# Altium PCB {TEX137}_F2837x_controlCARD_R1.3_PCB_PADS.PcbDoc (part 2 of 6)
Units mm, origin at the board's own origin, x right, y up, seen from the top; angles counter-clockwise.
Board outline 105.77 x 51.09 mm, 10 copper layers (Primary Side, Inner Layer 2, Inner Layer 3, Inner Layer 4, Inner Layer 5, Inner Layer 6, Inner Layer 7, Inner Layer 8, Inner Layer 9, Secondary Side), stack 1.634 mm thick; 292 components, 317 nets, 1400 pads, 1032 vias.
Unrouted connection lines stored in the file: 106.
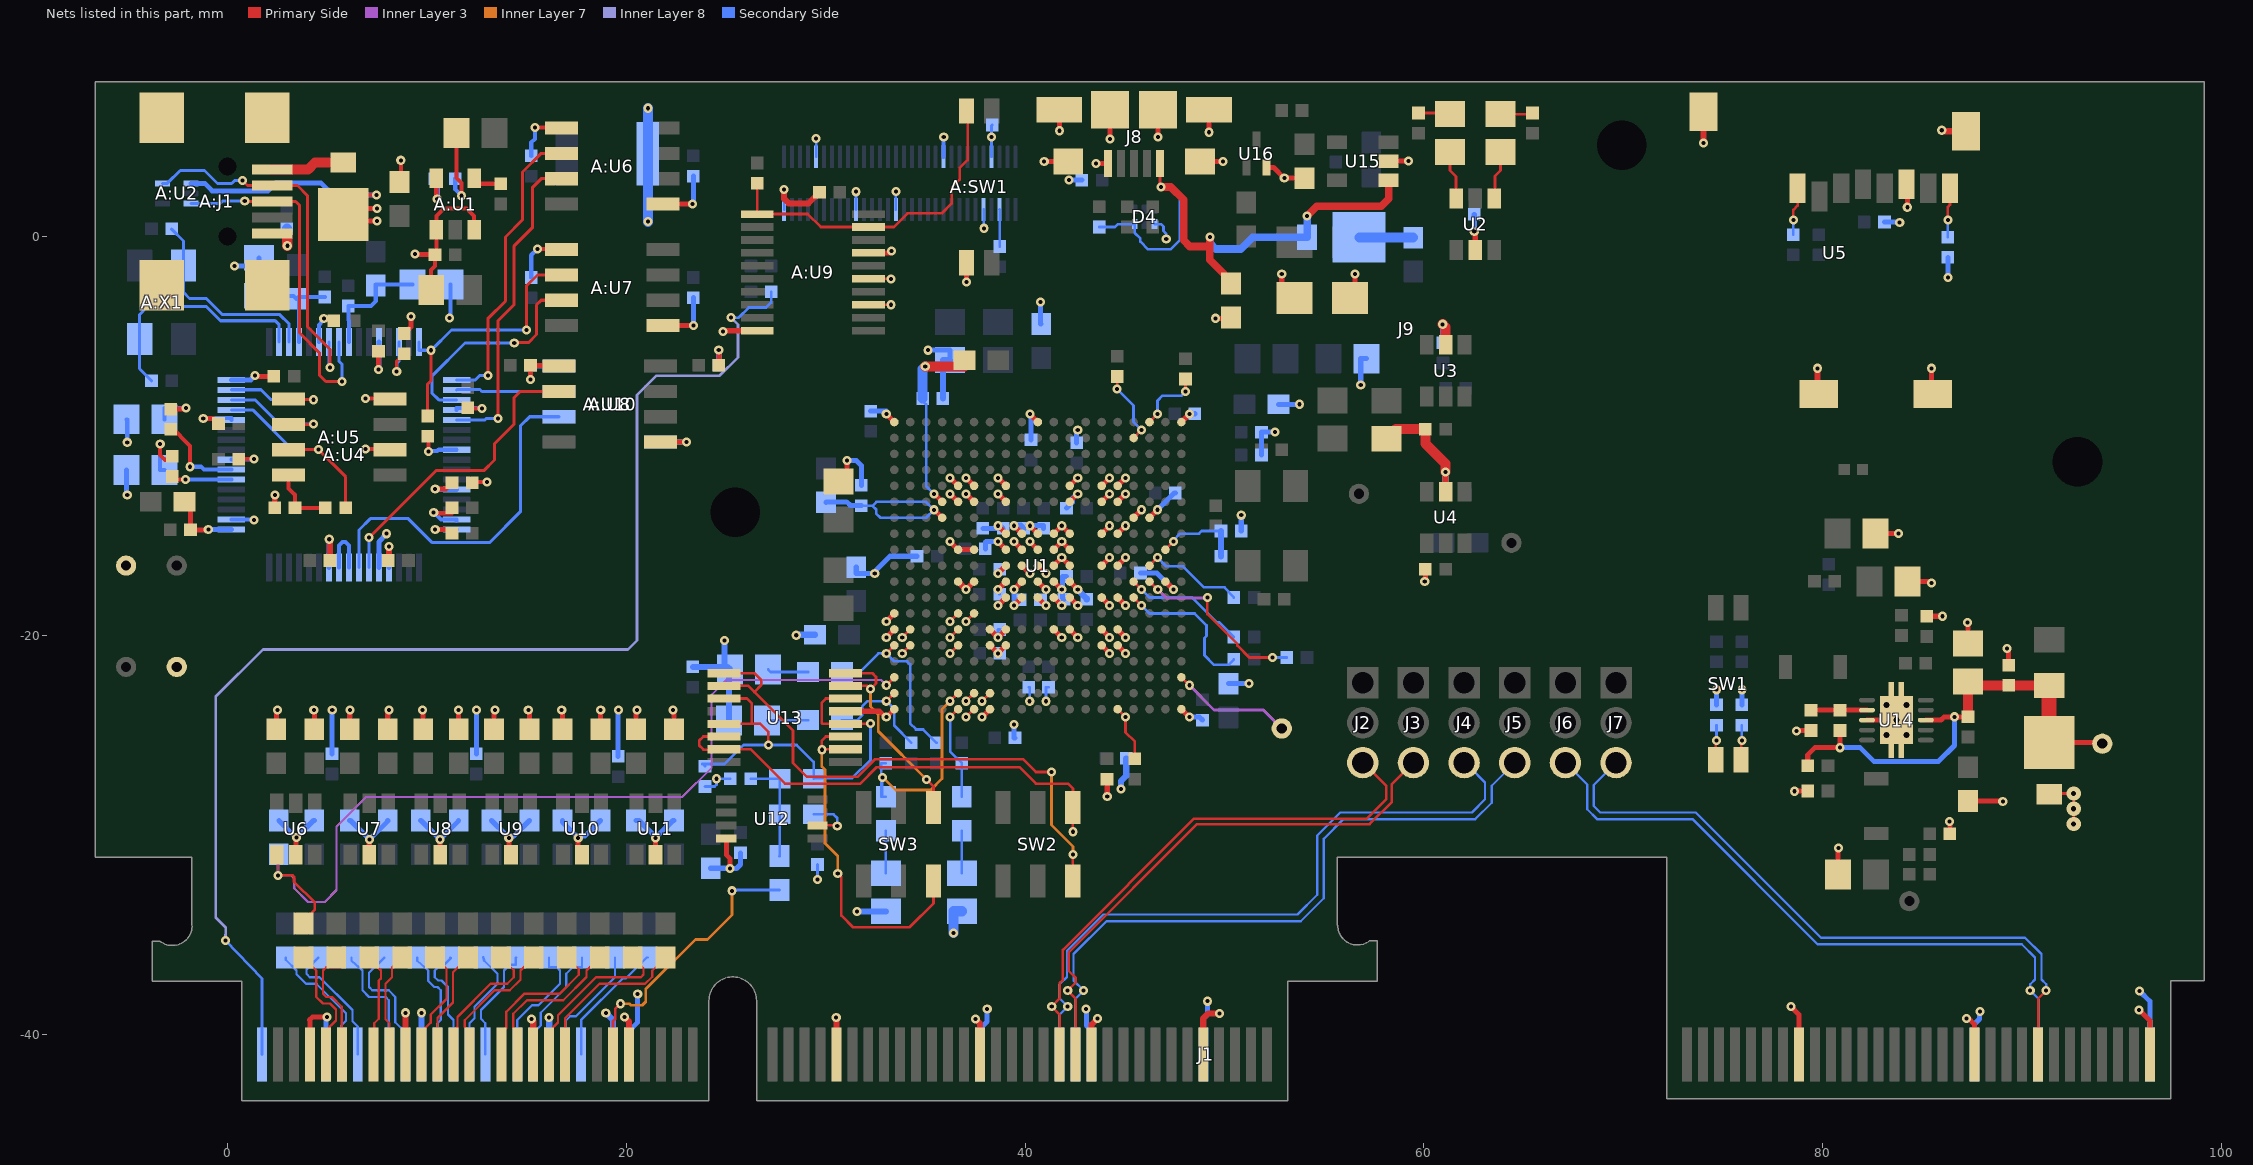
[diagram p10: the nets of this part, all layers, seen from the top]

## Via types
v1: diameter 0.457, hole 0.203, Primary Side to Secondary Side, 1025 vias
v2: diameter 0.711, hole 0.254, Primary Side to Secondary Side, 7 vias

## Nets (pads, with @x,y where several pads share a name; then routed paths per layer and width w, separated by ;. In a path a pad name is that pad's centre, name@x,y a point inside that pad or via, vN(x,y) a via of type N, cw(c..) or ccw(c..) an arc to the next point about the centre after c; other vN are vias at no path point) (continued)
$$$10464: J1.2 R2.1 | length 64.3
  Inner Layer 8 w0.14: v1(-0.097,-35.309) -0.088,-34.643 -0.583,-34.148 -0.583,-23.075 1.779,-20.713 20.092,-20.713 20.536,-20.269 20.536,-7.963 21.514,-6.985 24.686,-6.985 25.604,-6.068 25.604,-4.419 v1(25.261,-4.076)
  Secondary Side w0.135: v1(-0.097,-35.309) 1.735,-37.214 J1.2@1.735,-41.024 ; v1(25.261,-4.076) 25.642,-4.076 26.15,-3.568 27.014,-3.568 27.268,-3.314 R2.1@27.268,-2.782
$$$11861: C95.2 D3.2 D4.6 J8.1 R80.2 U15.1 | length 29.2
  Primary Side w0.135: J8.1@46.766,3.65 46.766,2.523 v1(46.813,2.476)
  Primary Side w0.381: v1(46.813,2.476) 47.308,2.476 47.955,1.829 47.955,-0.203 48.26,-0.508 49.264,-0.508 ; v1(49.264,-0.038) 49.264,-0.508 ; C95.2@50.331,-2.262 49.252,-1.182 49.264,-1.169 49.264,-0.508 ; v1(54.141,1.029) 54.154,1.029 54.636,1.512 57.849,1.512 58.23,1.893 U15.1@58.23,2.821
  Secondary Side w0.135: R80.2@43.727,0.469 44.507,0.469 44.654,0.616 D4.6@45.499,0.616 45.499,0.177 45.779,-0.102 45.779,-0.262 46.165,-0.649 47.294,-0.649 47.764,-0.179 47.764,1.93 47.218,2.476 v1(46.813,2.476) ; v1(49.264,-0.038) v1@49.276,-0.049
  Secondary Side w0.381: v1@49.276,-0.049 49.276,-0.356 49.555,-0.635 50.814,-0.635 51.41,-0.039 D3.2@54.141,-0.039 v1(54.141,1.029)
$$$12420: R10.2 U1.W15 | length 2.8
  Primary Side w0.135: U1.W15@44.64,-23.71 v1(45.04,-24.11) 45.04,-24.871 45.505,-25.336 R10.2@45.505,-26.201
$$$13142: R11.2 R12.2 U1.J18 | length 4.5
  Primary Side w0.135: U1.J18@47.04,-15.71 v1(47.441,-15.31)
  Secondary Side w0.135: v1(47.441,-15.31) 47.441,-15.249 47.779,-14.91 48.719,-14.91 48.858,-14.771 R11.2@49.823,-14.771
  Secondary Side w0.305: R12.2@49.823,-16.041 R11.2@49.823,-14.771
$$$13408: R54.2 R58.2 U1.V5 | length 11.2
  Primary Side w0.135: v1(36.24,-23.31) U1.V5@36.64,-22.91
  Inner Layer 7 w0.14: v1(32.842,-27.127) 32.868,-27.127 33.503,-27.762 35.268,-27.762 35.837,-27.193 35.837,-23.713 v1(36.24,-23.31)
  Secondary Side w0.135: v1(32.842,-27.127) R54.2@32.842,-28.105 ; R54.2@33.02,-28.105 R54.2@32.842,-28.105 ; R58.2@33.02,-26.416 32.791,-26.416 32.791,-28.105 R54.2@32.842,-28.105
$$$13414: R51.2 R55.2 U1.V1 | length 6
  Primary Side w0.135: v1(33.04,-23.31) U1.V1@33.44,-22.91
  Secondary Side w0.135: R51.2@30.823,-24.257 31.585,-24.257 31.839,-24.003 31.839,-23.559 32.088,-23.31 v1(33.04,-23.31) 33.44,-23.71 33.44,-24.537 34.29,-25.387 R55.2@34.29,-25.4
$$$13416: R52.2 R56.2 U1.W5 | length 4.8
  Primary Side w0.135: v1(36.24,-24.11) U1.W5@36.64,-23.71
  Secondary Side w0.135: v1(36.24,-24.11) 36.24,-25.826 R56.2@36.83,-26.416 R52.2@36.83,-28.105
$$$13417: R53.2 R57.2 U1.R1 | length 9.3
  Primary Side w0.135: v1(33.04,-20.91) U1.R1@33.44,-20.51
  Secondary Side w0.135: R53.2@30.823,-21.844 31.712,-21.844 32.646,-20.91 v1(33.04,-20.91) 33.44,-21.31 34.08,-21.31 34.24,-21.47 34.24,-24.423 34.519,-24.702 34.519,-24.727 34.887,-24.727 R57.2@35.56,-25.4
$$$14266: R8.2 U1.L16 | length 6.2
  Primary Side w0.135: U1.L16@45.44,-17.31 v1(45.84,-17.71)
  Secondary Side w0.135: v1(45.84,-17.71) 46.241,-18.111 48.375,-18.111 49.63,-19.366 49.744,-19.366 R8.2@50.471,-20.092
$$$14269: R7.2 U1.M16 | length 7.6
  Primary Side w0.135: U1.M16@45.44,-18.11 v1(45.84,-18.51)
  Secondary Side w0.135: v1(45.84,-18.51) 46.24,-18.91 48.501,-18.91 49.099,-19.508 49.099,-20.035 48.997,-20.136 48.997,-21.006 49.48,-21.489 50.191,-21.489 R7.2@50.471,-21.209
$$$14311: R4.1 U1.K17 | length 5.2
  Primary Side w0.135: U1.K17@46.24,-16.51 v1(46.64,-16.11)
  Secondary Side w0.135: v1(46.64,-16.11) 47.079,-16.549 47.918,-16.549 48.972,-17.603 ; 48.972,-17.603 50.002,-17.603 R4.1@50.471,-18.111
$$$14314: R3.1 U1.L17 | length 9
  Primary Side w0.135: U1.L17@46.24,-17.31 46.64,-17.71 v1(46.655,-17.71) ; v1(49.142,-18.111) 49.142,-18.941 50.642,-20.441 50.642,-20.521 51.242,-21.121 v1(52.414,-21.121)
  Inner Layer 3 w0.14: v1(46.655,-17.71) 47.079,-18.134 49.142,-18.134 v1(49.142,-18.111)
  Secondary Side w0.135: v1(52.414,-21.121) R3.1@53.125,-21.121
$$$14317: R5.1 U1.A17 | length 3.5
  Primary Side w0.135: U1.A17@46.24,-9.31 v1(46.64,-8.91) ; v1(48.045,-7.786) R5.1@48.045,-7.151
  Secondary Side w0.135: v1(46.64,-8.91) 46.64,-8.242 46.898,-7.985 47.846,-7.985 v1(48.045,-7.786)
$$$14320: R6.1 U1.B16 | length 3.8
  Primary Side w0.135: v1(44.616,-7.659) R6.1@44.616,-7.024 ; U1.B16@45.44,-10.11 v1(45.84,-9.71)
  Secondary Side w0.135: v1(44.616,-7.659) 45.44,-8.483 45.44,-9.31 v1(45.84,-9.71)
$$$14898: R22.1 SW1.3 | length 1.8
  Primary Side w0.135: SW1.3@74.637,-26.25 74.637,-25.312 v1(74.676,-25.273)
  Secondary Side w0.135: v1(74.676,-25.273) R22.1@74.676,-24.511
$$$14901: R23.1 SW1.4 | length 1.8
  Primary Side w0.135: SW1.4@75.907,-26.25 75.907,-25.312 v1(75.946,-25.273)
  Secondary Side w0.135: v1(75.946,-25.273) R23.1@75.946,-24.511
$$$15255: C47.2 R61.1 U13.3 U13.5 U13.12 U13.14 | length 22.8
  Primary Side w0.135: U13.5@24.892,-24.447 26.288,-24.447 ; U13.3@24.892,-23.177 26.059,-23.177 26.288,-23.406 26.288,-24.447 ; v1(27.127,-25.502) 27.127,-24.854 26.721,-24.447 26.288,-24.447 ; U13.14@30.988,-23.177 30.011,-23.177 29.808,-23.381 29.808,-24.423 29.832,-24.447 U13.12@30.988,-24.447 32.222,-24.447 v1(32.246,-24.423)
  Secondary Side w0.135: C47.2@23.952,-26.568 23.839,-26.455 23.813,-26.455 24.931,-26.455 25.337,-26.049 25.884,-25.502 v1(27.127,-25.502) 28.549,-25.502 29.4,-26.353 R61.1@29.4,-27.203 29.438,-27.166 31.332,-27.166 32.246,-26.252 v1(32.246,-24.423)
$$$15995: D3.1 R83.2 | length 2.7
  Secondary Side w0.135: D3.1@56.745,-0.039 D3.1@56.769,-0.064
  Secondary Side w0.508: D3.1@56.769,-0.064 R83.2@59.461,-0.064
$$$16409: C68.2 R64.1 U14.7 | length 3
  Primary Side w0.254: C68.2@79.414,-23.761 79.389,-23.736 79.389,-23.647 79.503,-23.761 R64.1@80.862,-23.761 80.862,-23.757 U14.7@82.218,-23.757
$$$18387: A:R17.1 A:SW1.4 A:U9.1 A:U9.19 | length 17.1
  Primary Side w0.135: A:R17.1@26.568,2.667 26.568,1.121 A:U9.1@26.57,1.119 29.099,1.119 29.76,0.469 A:U9.19@32.158,0.469 33.421,0.469 34.104,1.152 35.821,1.152 36.321,1.652 36.321,2.452 36.72,2.851 36.72,3.423 37.12,3.823 37.12,6.29 A:SW1.4@37.055,6.29
$$$19812: SW2.3 U13.1 U13.2 | length 28.6
  Primary Side w0.135: U13.2@24.892,-22.543 26.124,-22.543 26.426,-22.845 ; U13.1@24.892,-21.907 26.44,-21.907 26.77,-22.238 26.77,-22.5 26.426,-22.845 ; v1(41.327,-26.86) 40.538,-26.86 39.891,-26.213 32.487,-26.213 31.598,-27.102 29.058,-27.102 28.359,-26.403 28.359,-24.778 26.426,-22.845 ; SW2.3@42.39,-32.33 42.39,-31.016 v1(42.406,-31)
  Inner Layer 7 w0.14: v1(41.327,-26.86) 41.327,-29.514 42.406,-30.594 v1(42.406,-31)
$$$19948: SW3.6 U13.15 U13.16 | length 10.9
  Primary Side w0.135: U13.15@30.988,-22.543 32.093,-22.543 v1(32.246,-22.696) 32.526,-22.416 32.526,-22.086 32.348,-21.908 U13.16@30.988,-21.907 ; v1(35.052,-27.229) 35.242,-27.419 35.242,-27.422 35.405,-27.584 SW3.6@35.405,-28.63
  Inner Layer 7 w0.14: v1(32.246,-22.696) 32.246,-23.571 32.639,-23.964 32.639,-24.816 v1(35.052,-27.229)
$$$20039: SW3.3 U13.10 U13.11 | length 18.1
  Primary Side w0.135: v1(30.607,-31.953) 30.785,-32.131 30.785,-34.061 31.369,-34.646 34.211,-34.646 35.405,-33.452 SW3.3@35.405,-32.33 ; U13.10@30.988,-25.717 29.834,-25.717 v1(29.808,-25.744) 29.808,-25.286 30.011,-25.082 U13.11@30.988,-25.082
  Inner Layer 7 w0.14: v1(29.808,-25.744) 29.808,-26.582 29.972,-26.746 29.972,-30.434 30.607,-31.069 v1(30.607,-31.953)
$$$20040: SW2.6 U13.6 U13.7 | length 24.1
  Primary Side w0.135: U13.6@24.892,-25.082 23.864,-25.082 23.661,-25.285 23.661,-25.539 23.864,-25.742 24.868,-25.742 U13.7@24.892,-25.717 26.226,-25.717 27.952,-27.444 31.738,-27.444 32.563,-26.619 39.714,-26.619 40.538,-27.444 42.152,-27.444 42.406,-27.698 42.406,-28.614 SW2.6@42.39,-28.63 42.39,-29.841 v1(42.406,-29.857)
$$$20605: C16.2 R53.1 | length 2.1
  Secondary Side w0.135: C16.2@27.114,-21.717 27.241,-21.844 R53.1@29.121,-21.844
$$$20610: C17.2 R54.1 | length 2.1
  Secondary Side w0.135: C17.2@33.02,-31.941 R54.1@33.02,-29.807
$$$20616: C14.2 R51.1 | length 2.1
  Secondary Side w0.135: C14.2@27.064,-24.282 27.089,-24.257 R51.1@29.121,-24.257
$$$20617: C15.2 R52.1 | length 2.1
  Secondary Side w0.135: C15.2@36.83,-31.941 R52.1@36.83,-29.807
$$$22741: A:C4.2 A:U1.4 | length 1.6
  Primary Side w0.203: A:U1.4@12.375,2.918 12.375,2.639 A:C4.2@13.711,2.639
$$$22987: A:D2.2 A:R1.2 | length 4.2
  Primary Side w0.203: A:D2.2@11.489,5.179 11.488,3.434 11.488,2.926 11.742,2.672 v1(11.742,2.037)
  Secondary Side w0.203: A:R1.2@11.425,2.893 11.425,2.363 11.437,2.352 11.437,2.342 v1(11.742,2.037)
$$$23904: A:R7.1 A:U4.24 | length 2.3
  Primary Side w0.203: A:R7.1@10.039,-10.025 10.091,-10.025 v1(10.091,-10.79)
  Secondary Side w0.203: v1(10.091,-10.79) 10.091,-10.774 10.523,-10.774 10.597,-10.7 A:U4.24@11.498,-10.7
$$$24422: A:R8.1 A:U4.28 | length 2.1
  Primary Side w0.254: v1(10.42,-12.662) 10.948,-12.662 A:R8.1@11.263,-12.347
  Secondary Side w0.254: v1(10.42,-12.662) 10.42,-12.7 A:U4.28@11.498,-12.7
$$$24639: A:R9.1 A:U4.32 | length 2.1
  Primary Side w0.254: v1(10.42,-14.694) 11.263,-14.694 A:R9.1@11.263,-14.887
  Secondary Side w0.254: v1(10.42,-14.694) 10.427,-14.701 A:U4.32@11.498,-14.701
$$$24688: A:U4.40 A:U4.41 | length 2.9
  Secondary Side w0.203: A:U4.41@5.597,-16.602 5.588,-16.593 5.588,-15.494 5.766,-15.316 5.919,-15.316 6.097,-15.494 A:U4.40@6.097,-16.602
$$$25045: A:J1.2 A:U2.5 A:U4.7 | length 18.5
  Primary Side w0.152: v1(0.762,2.794) 1.006,2.55 A:J1.2@2.25,2.55 3.511,2.55 4.019,2.042 4.019,-4.534 5.137,-5.652 v1(5.137,-6.566)
  Secondary Side w0.152: A:U2.5@-3.251,2.659 -3.012,2.659 -2.364,3.307 -1.148,3.307 -0.495,2.654 0.216,2.654 0.356,2.794 v1(0.762,2.794) ; A:U4.7@5.097,-5.299 5.097,-6.526 v1(5.137,-6.566)
$$$25047: A:J1.3 A:U2.3 A:U4.8 | length 17.8
  Primary Side w0.152: v1(0.87,1.765) 0.885,1.75 1.987,1.75 A:J1.3@2.25,1.75 3.425,1.75 3.613,1.562 3.613,-4.839 4.629,-5.855 4.629,-6.973 4.934,-7.277 v1(5.746,-7.277)
  Secondary Side w0.152: A:U2.3@-1.829,1.659 -0.35,1.659 -0.243,1.765 v1(0.87,1.765) ; A:U4.8@5.597,-5.299 5.597,-6.261 5.746,-6.411 v1(5.746,-7.277)
$$$25123: A:J1.5 A:J1.6 A:J1.7 A:J1.8 A:J1.9 A:R10.1 | length 2.5
  Primary Side w0.203: A:J1.7@1.987,-2.45 A:J1.7@2,-2.45
  Primary Side w0.254: A:J1.7@1.987,-2.45 A:J1.7@2.25,-2.45 ; A:J1.5@2.25,0.15 A:J1.5@3.003,0.15
  Primary Side w0.508: v1(3.003,-0.47) A:J1.5@3.003,0.15
  Secondary Side w0.254: v1@2.979,-0.446 v1(3.003,-0.47)
  Secondary Side w0.508: v1@2.979,-0.446 A:R10.1@2.979,0.386
$$$25417: A:R6.2 A:U4.6 | length 1.8
  Primary Side w0.254: v1(4.832,-4.128) A:R6.2@5.34,-4.229
  Secondary Side w0.203: A:U4.6@4.596,-5.299 4.596,-4.449 v1(4.832,-4.128)
$$$25426: A:R5.2 A:U4.14 | length 2.6
  Primary Side w0.152: v1(8.49,-6.769) 8.49,-6.262 A:R5.2@8.863,-5.888
  Secondary Side w0.152: v1(8.49,-6.769) 8.496,-6.763 8.496,-6.363 8.597,-6.261 A:U4.14@8.597,-5.299
$$$25435: C81.2 R75.2 U1.G4 | length 10
  Primary Side w0.254: v1(35.44,-13.71) U1.G4@35.84,-14.11
  Secondary Side w0.135: C81.2@31.789,-13.501 32.335,-13.501 32.347,-13.514 ; 32.347,-13.514 32.551,-13.31 35.04,-13.31 v1(35.44,-13.71) 35.041,-14.11 32.74,-14.11 32.542,-13.912 32.542,-13.708 32.347,-13.514
  Secondary Side w0.254: R75.2@30.011,-13.336 30.035,-13.312 31.055,-13.312 31.244,-13.501 C81.2@31.789,-13.501
$$$25439: C80.2 R74.2 U1.F4 | length 10.7
  Primary Side w0.254: v1(35.44,-12.91) U1.F4@35.84,-13.31 ; R74.2@36.958,-6.522 R74.2@36.958,-6.21
  Primary Side w0.508: v1(34.993,-6.522) R74.2@36.958,-6.522
  Secondary Side w0.135: C80.2@34.862,-8.128 34.837,-7.544 34.837,-8.218 35.04,-8.421 35.04,-12.51 v1(35.44,-12.91)
  Secondary Side w0.508: C80.2@34.862,-8.128 34.862,-6.653 v1(34.993,-6.522)
$$$25557: A:R13.1 A:U4.60 | length 2.4
  Primary Side w0.254: v1(-1.212,-9.139) -0.688,-9.139 A:R13.1@-0.446,-9.381
  Secondary Side w0.203: v1(-1.212,-9.139) -1.212,-9.098 0.195,-9.098 A:U4.60@0.195,-9.2
$$$25559: A:R14.1 A:U4.36 | length 1.8
  Primary Side w0.305: A:R14.1@8.066,-16.251 8.103,-16.215 v1(8.103,-15.545)
  Secondary Side w0.254: A:U4.36@8.097,-16.602 8.097,-15.545 v1(8.103,-15.545)
$$$25663: A:R11.1 A:U4.54 | length 3.2
  Primary Side w0.203: A:R11.1@-2.769,-12.04 -2.834,-12.187 v1(-2.101,-12.187)
  Secondary Side w0.203: v1(-2.101,-12.187) -1.191,-12.187 -1.177,-12.2 A:U4.54@0.195,-12.2
$$$25664: A:R12.1 A:U4.55 | length 4.7
  Primary Side w0.203: A:R12.1@-2.834,-9.68 -2.834,-9.543 -1.874,-10.504 v1(-1.874,-11.552)
  Secondary Side w0.203: v1(-1.874,-11.552) -1.325,-11.552 -1.177,-11.7 A:U4.55@0.195,-11.7
$$$25838: A:D3.1 A:R11.2 | length 2.8
  Primary Side w0.203: v1(-3.371,-10.409) -3.371,-10.955 -3.123,-11.204 A:R11.2@-2.769,-11.024
  Secondary Side w0.203: v1(-3.371,-10.409) -3.371,-11.712 A:D3.1@-3.152,-11.712
$$$25841: A:D4.1 A:R12.2 | length 2.4
  Primary Side w0.254: A:R12.2@-2.834,-8.664 -2.143,-8.664 v1(-2.077,-8.598)
  Secondary Side w0.203: A:D4.1@-3.152,-9.172 -3.152,-8.598 v1(-2.077,-8.598)
$$$26166: A:U4.63 A:U5.1 | length 5.6
  Primary Side w0.152: A:U5.1@3.069,-8.156 3.069,-8.192 v1(4.324,-8.192)
  Secondary Side w0.152: A:U4.63@0.195,-7.699 0.195,-7.691 1.682,-7.691 2.183,-8.192 v1(4.324,-8.192)
$$$26177: A:U4.62 A:U5.2 | length 5.9
  Primary Side w0.152: A:U5.2@3.069,-9.426 4.324,-9.426 v1(4.324,-9.411)
  Secondary Side w0.152: A:U4.62@0.195,-8.199 1.385,-8.199 2.597,-9.411 v1(4.324,-9.411)
$$$26181: A:R16.2 A:U4.61 A:U5.3 | length 10.2
  Primary Side w0.152: A:U5.3@3.069,-10.696 v1(4.567,-10.696) 5.929,-12.058 A:R16.2@5.929,-13.617
  Secondary Side w0.152: A:U4.61@0.195,-8.699 1.269,-8.699 3.266,-10.696 v1(4.567,-10.696)
$$$26231: A:R15.2 A:R16.1 A:U5.4 | length 3.3
  Primary Side w0.203: A:U5.4@3.069,-11.966 3.069,-12.638 3.389,-12.958 A:R15.2@3.389,-13.617 A:R16.1@4.913,-13.617
$$$26444: R17.1 U5.8 | length 2.5
  Primary Side w0.135: v1(86.272,0.826) 86.272,1.475 86.385,1.588 U5.8@86.385,2.413
  Secondary Side w0.135: R17.1@86.272,-0.039 v1(86.272,0.826)
$$$26493: A:C18.2 A:U4.2 A:X1.1 | length 12
  Secondary Side w0.152: A:C18.2@-3.81,-7.239 -4.414,-6.635 -4.414,-5.164 A:X1.1@-4.402,-5.152 -4.414,-5.14 -4.414,-3.925 -4.007,-3.518 -1.062,-3.518 -0.35,-4.23 2.394,-4.23 2.596,-4.433 A:U4.2@2.596,-5.299
$$$26501: A:C19.2 A:U4.3 A:X1.3 | length 10.4
  Secondary Side w0.152: A:C19.2@-2.794,0.381 -2.794,0.357 -2.202,-0.235 A:X1.3@-2.202,-1.392 ; A:X1.3@-2.202,-1.452 A:X1.3@-2.202,-1.392 ; A:U4.3@3.096,-5.299 3.096,-4.397 2.624,-3.925 -0.248,-3.925 -1.061,-3.112 -1.897,-3.112 -2.202,-2.807 A:X1.3@-2.202,-1.392
$$$26510: R16.2 U5.1 | length 2.4
  Primary Side w0.135: v1(78.525,0.826) 78.525,1.334 78.74,1.549 U5.1@78.74,2.413
  Secondary Side w0.135: R16.2@78.525,0.088 v1(78.525,0.826)
$$$26898: A:C15.2 A:C16.2 A:L2.2 A:U4.9 | length 6
  Secondary Side w0.203: A:U4.9@6.097,-5.299 6.097,-4.22 6.063,-4.186 A:C16.2@6.063,-3.488 7.199,-3.488 7.439,-3.248 A:C15.2@7.439,-2.468 7.439,-2.418 A:L2.2@9.287,-2.418
$$$26901: A:C13.2 A:C14.2 A:L1.2 A:U4.4 | length 7
  Secondary Side w0.203: A:L1.2@1.582,-2.98 3.32,-2.98 A:C13.2@3.469,-3.128 ; A:C13.2@3.487,-3.132 3.483,-3.128 A:C13.2@3.469,-3.128 ; A:U4.4@3.596,-5.299 3.596,-3.043 A:C14.2@4.884,-3.043 3.554,-3.043 A:C13.2@3.469,-3.128
$$$28456: J9.54 R25.2 | length 1.6
  Secondary Side w0.135: J9.54@38.32,3.992 v1(38.321,4.992) 38.321,5.554 R25.2@38.354,5.588
$$$28488: J9.55 R26.1 | length 1.9
  Secondary Side w0.135: J9.55@38.72,1.352 38.735,1.337 R26.1@38.735,-0.508
$$$30996: LD2.2 R13.2 | length 1.6
  Primary Side w0.135: R13.2@59.729,6.184 61.252,6.184 LD2.2@61.304,6.131
$$$30998: LD2.1 U2.6 | length 2.5
  Primary Side w0.135: LD2.1@61.304,4.226 61.304,3.299 61.61,2.993 61.61,1.917 U2.6@61.625,1.902
$$$31033: LD3.1 U2.4 | length 2.5
  Primary Side w0.135: U2.4@63.524,1.902 63.566,1.944 63.566,3.02 63.844,3.299 LD3.1@63.844,4.226
$$$31036: LD3.2 R14.2 | length 1.7
  Primary Side w0.135: LD3.2@63.844,6.131 65.444,6.131 R14.2@65.444,6.184
$$$31437: TP1.1 U1.U19 | length 6.1
  Primary Side w0.135: U1.U19@47.84,-22.11 v1(48.24,-22.51)
  Inner Layer 3 w0.14: v1(48.24,-22.51) 49.479,-23.749 51.943,-23.749 TP1.1@52.871,-24.677
$$$31715: C46.2 R59.1 R60.2 R61.2 | length 5.3
  Secondary Side w0.135: C46.2@26.238,-27.203 R61.2@27.699,-27.203 R60.2@27.699,-28.981 27.699,-31.064 R59.1@27.686,-31.077
$$$31721: R60.1 U12.6 | length 2.7
  Primary Side w0.135: U12.6@29.591,-29.535 30.551,-29.535 v1(30.582,-29.566)
  Secondary Side w0.135: R60.1@29.4,-28.981 30.404,-28.981 30.582,-29.159 v1(30.582,-29.566)
EMU_1V8: A:C5.2 A:C6.2 A:C7.2 A:C8.2 A:U4.12 A:U4.37 A:U4.49 A:U4.64 | length 10.2
  Primary Side w0.254: A:C5.2@-2.146,-13.31 -1.853,-13.31 A:C7.2@-1.853,-14.717 ; A:C7.2@-1.878,-14.743 A:C7.2@-1.853,-14.717 ; v1(-0.959,-14.694) -0.982,-14.717 A:C7.2@-1.853,-14.717 ; v1(1.378,-6.973) 1.378,-7.017 A:C8.2@2.331,-7.017 ; v1(7.575,-6.668) A:C6.2@7.575,-5.753
  Secondary Side w0.254: v1(-0.959,-14.694) -0.952,-14.701 A:U4.49@0.195,-14.701 ; A:U4.64@0.195,-7.199 1.174,-7.199 1.174,-7.176 v1(1.378,-6.973) ; v1(7.575,-6.668) 7.597,-6.646 A:U4.12@7.597,-5.299 ; A:U4.37@7.597,-16.602 7.597,-15.316 v1(7.976,-14.91)
EMU_3V3: A:C2.2 A:C9.2 A:C10.2 A:C11.2 A:C12.2 A:C20.2 A:C22.2 A:C25.2 A:C27.2 A:L1.1 A:L2.1 A:R1.1 A:R5.1 A:R8.2 A:R15.1 A:TP1.1 A:U1.5 A:U4.20 A:U4.31 A:U4.42 A:U4.50 A:U4.56 A:U5.6 A:U5.8 A:U6.1 A:U7.1 A:U8.8 A:U10.1 | length 32
  Primary Side w0.203: A:C12.2@0.565,-11.183 0.565,-11.171 v1(1.328,-11.171) ; v1(6.916,-10.663) 8.149,-10.663 A:U5.6@8.149,-10.696 ; v1(6.916,-8.123) 8.149,-8.123 A:U5.8@8.149,-8.156 ; A:C2.2@8.631,2.728 8.694,2.728 v1(8.694,3.815) ; v1(10.345,-13.838) 10.345,-13.884 11.263,-13.884 A:C10.2@11.263,-13.617 ; A:C9.2@12.057,-8.591 12.057,-8.631 v1(12.758,-8.631) ; A:R8.2@12.279,-12.347 12.279,-12.314 v1(13.012,-12.314) ; v1(15.425,5.466) 16.759,5.466 A:U6.1@16.759,5.433 ; v1(15.552,-0.63) 16.759,-0.63 A:U7.1@16.759,-0.663 ; A:U10.1@16.637,-6.505 A:U10.1@16.637,-6.472
  Primary Side w0.254: A:R15.1@2.373,-13.617 2.373,-12.967 v1(2.394,-12.967) ; A:R5.1@8.863,-4.872 9.201,-4.535 v1(9.201,-4.026) ; A:U1.5@10.475,2.918 10.475,1.913 v1(10.522,1.867) ; v1(15.195,-7.176) A:C27.2@15.195,-6.465 16.597,-6.465 A:U10.1@16.637,-6.505
  Primary Side w0.305: v1(5.105,-15.189) 5.145,-15.229 A:C11.2@5.145,-16.251
  Secondary Side w0.203: A:U4.50@0.195,-14.201 1.328,-14.201 v1(1.328,-14.219) ; A:U4.56@0.195,-11.2 1.328,-11.2 v1(1.328,-11.171) ; v1(10.345,-13.838) 10.708,-14.201 A:U4.31@11.498,-14.201 A:U4.31@11.498,-14.27 ; v1(11.139,-4.092) 11.192,-4.092 A:L2.1@11.192,-2.418 ; A:U4.20@11.498,-8.699 11.498,-8.598 12.758,-8.598 v1(12.758,-8.631) ; A:C22.2@15.235,-2.06 15.235,-0.947 v1(15.552,-0.63) ; A:C20.2@15.235,4.036 15.235,4.701 15.425,4.89 v1(15.425,5.466)
  Secondary Side w0.254: v1(0.362,-1.486) 1.582,-1.486 A:L1.1@1.582,-1.075 ; A:U4.42@5.097,-16.602 5.097,-15.198 v1(5.105,-15.189) ; A:R1.1@10.409,2.893 10.522,2.781 v1(10.522,1.867) ; v1(15.195,-7.176) A:C25.2@15.195,-6.465 15.236,-6.505 A:U8.8@16.632,-6.505
EMU_5V0: A:C1.2 A:C3.1 A:D1.1 A:D3.2 A:D4.2 A:U1.1 A:U1.3 A:U2.1 | length 26.7
  Primary Side w0.203: A:D1.1@5.812,1.097 5.812,2.07 v1(7.474,2.07) ; A:C3.1@10.219,-2.695 10.219,-1.685 10.409,-1.495 A:C1.2@10.409,-0.917 10.475,-0.917 A:U1.1@10.475,0.328 10.475,1.026 10.851,1.402 11.999,1.402 12.375,1.026 A:U1.3@12.375,0.328
  Primary Side w0.254: v1(7.493,0.762) 5.812,0.762 A:D1.1@5.812,1.097 5.812,1.397 v1(7.493,1.397) ; v1(9.404,-0.877) 9.445,-0.917 A:C1.2@10.409,-0.917
  Secondary Side w0.203: A:D4.2@-5.057,-9.172 -5.023,-9.172 v1(-5.023,-10.325)
  Secondary Side w0.254: A:D3.2@-5.057,-11.712 -5.057,-12.933 v1(-5.023,-12.967) ; A:U2.1@-1.829,2.659 -1.135,2.659 -0.762,2.286 2.032,2.286 2.413,2.667 4.699,2.667 5.296,2.07 v1(7.474,2.07)
EMU_SCI-RX: A:U4.38 A:U10.2 | length 15.3
  Primary Side w0.152: v1(7.097,-15.108) 10.457,-11.748 12.858,-11.748 13.394,-11.212 13.394,-10.4 14.382,-9.411 14.382,-8.08 14.687,-7.775 A:U10.2@16.637,-7.775
  Secondary Side w0.152: A:U4.38@7.097,-16.602 v1(7.097,-15.108)
EMU_SCI-TX: A:U4.39 A:U8.6 | length 17.8
  Secondary Side w0.152: A:U4.39@6.597,-16.602 6.597,-14.727 7.17,-14.154 9.067,-14.154 10.275,-15.362 13.139,-15.362 14.687,-13.814 14.687,-9.513 15.155,-9.045 A:U8.6@16.632,-9.045
EMU_TCK: A:R7.2 A:U4.16 A:U7.2 | length 13.8
  Primary Side w0.152: A:R7.2@10.039,-9.009 10.039,-7.405 10.218,-7.226 v1(10.218,-5.71) ; v1(14.992,-4.694) 14.992,-2.493 15.552,-1.933 A:U7.2@16.759,-1.933
  Secondary Side w0.152: A:U4.16@9.598,-5.299 9.598,-5.71 v1(10.218,-5.71) 11.234,-4.694 v1(14.992,-4.694)
EMU_TDI: A:U4.17 A:U6.2 | length 14.9
  Primary Side w0.152: v1(13.062,-6.98) 13.062,-4.128 13.94,-3.249 13.94,-0.028 14.799,0.83 14.799,3.231 15.731,4.163 A:U6.2@16.759,4.163
  Secondary Side w0.152: A:U4.17@11.498,-7.199 12.429,-7.199 12.648,-6.98 v1(13.062,-6.98)
EMU_TDO: A:U4.18 A:U8.7 | length 5.2
  Secondary Side w0.152: A:U4.18@11.498,-7.699 11.514,-7.684 12.666,-7.684 12.757,-7.775 A:U8.7@16.632,-7.775
EMU_TMS: A:U4.19 A:U7.3 | length 11.2
  Primary Side w0.152: v1(14.382,-5.347) 14.4,-5.329 15.094,-5.329 15.5,-4.923 15.5,-3.434 15.731,-3.203 A:U7.3@16.759,-3.203
  Secondary Side w0.152: A:U4.19@11.498,-8.199 10.599,-8.199 10.25,-7.851 10.25,-7.013 11.917,-5.347 v1(14.382,-5.347)
EMU_TRSTN: A:U4.21 A:U6.3 | length 16.1
  Primary Side w0.152: v1(13.57,-9.139) 13.57,-4.229 14.382,-3.417 14.382,-0.475 15.308,0.451 15.308,2.471 15.731,2.893 A:U6.3@16.759,2.893
  Secondary Side w0.152: A:U4.21@11.498,-9.2 12.904,-9.2 12.965,-9.139 v1(13.57,-9.139)
EMU_USB_5V0: A:D1.2 A:J1.1 | length 3.7
  Primary Side w0.508: A:J1.1@2.25,3.35 4.046,3.35 4.396,3.7 A:D1.2@5.812,3.7
GND: A:C21.1 A:C23.1 A:C24.1 A:C26.1 A:C28.1 A:C31.1 A:SW1.1 A:U6.5 A:U7.5 A:U8.4 A:U9.10 A:U9.13 A:U9.15 A:U9.17 A:U10.5 C1.1 C2.1 C3.1 C4.1 C5.1 C6.1 C9.1 C10.1 C11.1 C12.1 C13.1 C14.1 C15.1 C16.1 C17.1 C18.1 C19.1 C20.1 C21.1 C22.1 C23.1 C24.1 C25.1 C26.1 C27.1 C28.1 C29.1 C30.1 C31.1 C32.1 C33.1 C34.1 C35.1 C36.1 C37.1 C38.1 C39.1 C40.1 C41.1 C42.2 C43.2 C44.1 C45.1 C46.1 C47.1 C48.1 C49.2 C50.2 C51.2 C52.2 C53.2 C54.2 C55.2 C56.2 C57.2 C58.2 C59.2 C60.2 C61.2 C62.2 C63.2 C64.2 C65.1 C66.1 C67.1 C68.1 C70.1 C71.1 C72.1 C73.1 C74.1 C75.1 C76.1 C77.1 C78.1 C79.1 C80.1 C81.1 C82.1 C83.1 C84.1 C85.1 C86.1 C87.1 C88.1 C89.1 C90.1 C91.1 C92.1 C93.2 C94.2 C95.1 D4.4 J1.7 J1.10 J1.19 J1.22 J1.35 J1.38 J1.46 J1.47 J1.65 J1.83 J1.97 J1.111 J1.135 J1.157 J1.179 J8.5 J8.6 J8.7 J8.8 J8.9 J8.10 J8.11 J9.1 J9.10 J9.19 J9.29 J9.42 J9.51 LD1.1 R9.1 R11.1 R17.2 R22.2 R23.2 R70.2 R71.2 R73.2 R79.2 R86.2 TP7.1 U1.A1 U1.A10 U1.A19 U1.E5 U1.E6 U1.E8 U1.E12 U1.E14 U1.E15 U1.F5 U1.F6 U1.F8 U1.F12 U1.F14 U1.F15 U1.G16 U1.G17 U1.H8 U1.H9 U1.H10 U1.H11 U1.H12 U1.H14 U1.H15 U1.J5 U1.J6 U1.J8 U1.J9 U1.J10 U1.J11 U1.J12 U1.K8 U1.K9 U1.K10 U1.K11 U1.K12 U1.K14 U1.K15 U1.L5 U1.L6 U1.L8 U1.L9 U1.L10 U1.L11 U1.L12 U1.L18 U1.M8 U1.M9 U1.M10 U1.M11 U1.M12 U1.M14 U1.M15 U1.N1 U1.N5 U1.N6 U1.P1 U1.P2 U1.P5 U1.P7 U1.P8 U1.P11 U1.P12 U1.P14 U1.P15 U1.R2 U1.R5 U1.R7 U1.R8 U1.R14 U1.R15 U1.V6 U1.V7 U1.W1 U1.W6 U1.W7 U1.W19 U2.2 U3.2 U4.2 U5.6 U5.9 U5.10 U5.11 U5.12 U6.2 U7.2 U8.2 U9.2 U10.2 U11.2 U12.4 U13.13 U14.8 U14.15 U14.16 U14.17 U14.18 U14.19 U14.20 U14.21 U14.22 U14.23 U15.2 U16.2 | length 261.8
  Primary Side w0.127: v1(36.24,-20.91) U1.R5@36.64,-20.51
  Primary Side w0.135: A:U9.13@32.158,-3.431 33.274,-3.431 v1(33.274,-3.43) ; A:U9.15@32.158,-2.131 33.248,-2.131 v1(33.274,-2.134) ; v1(33.84,-20.91) U1.R2@34.24,-20.51 ; v1(33.84,-20.11) U1.P2@34.24,-19.71 ; v1(36.24,-20.11) U1.P5@36.64,-19.71 ; v1(36.24,-19.31) U1.N5@36.64,-18.91 ; v1(37.04,-24.11) U1.W6@37.44,-23.71 ; v1(37.04,-23.31) U1.V6@37.44,-22.91 ; v1(37.04,-19.31) U1.N6@37.44,-18.91 ; v1(37.84,-23.31) U1.V7@38.24,-22.91 ; v1(49.542,-4.108) 50.331,-4.108 C95.1@50.331,-4.065 ; U14.22@83.193,-25.007 83.205,-25.019 83.443,-25.019 U14.15@83.443,-25.757 ; U14.20@83.193,-23.507 83.404,-23.507 83.443,-23.546 U14.18@83.443,-22.757 ; U14.19@83.693,-24.257 83.943,-24.257 U14.16@83.943,-25.757 ; U14.17@83.943,-22.757 83.943,-23.546 84.154,-23.546 U14.21@84.193,-23.507
  Primary Side w0.254: C21.1@2.452,-24.715 2.452,-23.812 v1(2.515,-23.749) ; U6.2@3.429,-31.013 3.429,-30.177 v1(3.468,-30.138) ; J1.7@4.135,-41.024 4.135,-39.314 4.118,-39.296 4.259,-39.155 v1(4.992,-39.155) ; v1(4.331,-23.749) 4.357,-23.775 C20.1@4.357,-24.715 ; C25.1@6.135,-24.715 6.135,-23.761 v1(6.147,-23.749) ; U7.2@7.112,-31.013 7.112,-30.289 v1(7.126,-30.238) ; C24.1@8.04,-24.715 8.04,-23.812 v1(8.103,-23.749) ; v1(9.779,-23.749) 9.818,-23.788 C29.1@9.818,-24.715 ; v1(10.656,-30.238) 10.668,-30.289 U8.2@10.668,-31.013 ; v1(11.595,-23.749) v1(11.595,-23.749) C28.1@11.596,-24.715 ; C33.1@13.374,-24.715 13.374,-23.786 v1(13.411,-23.749) ; v1(14.111,-30.162) 14.111,-31.013 U9.2@14.224,-31.013 ; v1(15.088,-23.749) 15.152,-23.749 C32.1@15.152,-24.715 ; v1(16.764,-23.749) 16.803,-23.788 C37.1@16.803,-24.715 ; v1(17.59,-30.162) 17.59,-31.013 U10.2@17.78,-31.013 ; C36.1@18.708,-24.715 18.708,-23.761 v1(18.72,-23.749) ; C41.1@20.486,-24.715 20.486,-23.799 v1(20.536,-23.749) ; U11.2@21.463,-31.013 21.463,-30.2 v1(21.464,-30.162) ; A:U10.5@21.717,-10.315 23.001,-10.315 v1(23.014,-10.302) ; A:U7.5@21.839,-4.473 23.366,-4.473 v1(23.369,-4.47) ; A:U6.5@21.839,1.623 v1(23.319,1.623) ; v1(22.352,-23.749) 22.391,-23.788 C40.1@22.391,-24.715 ; v1(24.639,-5.689) 24.644,-5.694 A:C28.1@24.644,-6.465 ; v1(24.843,-4.778) 24.89,-4.731 A:U9.10@26.57,-4.731 ; U12.4@25.019,-30.185 25.019,-31.013 25.197,-31.191 v1(25.197,-31.699) ; C82.1@30.646,-12.295 31.065,-12.295 v1(31.065,-11.24) ; U13.13@30.988,-23.812 32.693,-23.813 v1(33.04,-24.11) U1.W1@33.44,-23.71 ; A:U9.17@32.158,-0.831 33.274,-0.831 v1(33.299,-0.737) ; v1(33.04,-20.11) U1.P1@33.44,-19.71 ; v1(33.04,-19.31) U1.N1@33.44,-18.91 ; v1(33.04,-8.91) U1.A1@33.44,-9.31 ; v1(36.24,-15.31) U1.J5@36.64,-15.71 U1.J6@37.44,-15.71 ; v1(36.24,-12.91) U1.F5@36.64,-13.31 ; v1(36.24,-12.11) U1.E5@36.64,-12.51 ; v1(37.04,-17.71) U1.L6@37.44,-17.31 ; v1(37.04,-12.91) U1.F6@37.44,-13.31 ; v1(37.04,-12.11) U1.E6@37.44,-12.51 ; A:SW1.1@37.055,-1.33 37.055,-2.287 v1(37.071,-2.287) ; v1(37.84,-24.11) U1.W7@38.24,-23.71 ; U1.R7@38.24,-20.51 v1(38.64,-20.91) U1.R8@39.04,-20.51 ; U1.P7@38.24,-19.71 v1(38.64,-20.11) U1.P8@39.04,-19.71 ; v1(38.64,-18.51) U1.M8@39.04,-18.11 ; v1(38.64,-17.71) U1.L8@39.04,-17.31 ; v1(38.64,-16.91) U1.K8@39.04,-16.51 ; v1(38.64,-15.31) U1.J8@39.04,-15.71 ; v1(38.64,-14.51) U1.H8@39.04,-14.91 ; v1(38.64,-12.91) U1.F8@39.04,-13.31 ; v1(38.64,-12.11) U1.E8@39.04,-12.51 ; v1(39.44,-18.51) U1.M9@39.84,-18.11 ; v1(39.44,-17.71) U1.L9@39.84,-17.31 ; v1(39.44,-15.31) U1.J9@39.84,-15.71 ; v1(39.44,-14.51) U1.H9@39.84,-14.91 ; U1.K9@39.84,-16.51 v1(40.24,-16.91) ; v1(40.24,-15.31) U1.J10@40.64,-15.71 ; v1(40.24,-14.51) U1.H10@40.64,-14.91 ; v1(40.24,-8.91) U1.A10@40.64,-9.31 ; U1.M10@40.64,-18.11 v1(41.04,-18.51) ; U1.L10@40.64,-17.31 v1(41.04,-17.71) ; U1.K10@40.64,-16.51 v1(41.04,-16.91) ; v1(40.958,3.747) 40.961,3.75 J8.6@42.166,3.75 ; U1.P11@41.44,-19.71 v1(41.84,-20.11) ; U1.M11@41.44,-18.11 v1(41.84,-18.51) ; U1.L11@41.44,-17.31 v1(41.84,-17.71) ; U1.K11@41.44,-16.51 v1(41.84,-16.11) U1.K12@42.24,-16.51 ; U1.J11@41.44,-15.71 v1(41.84,-15.31) U1.J12@42.24,-15.71 ; U1.H11@41.44,-14.91 v1(41.84,-14.51) U1.H12@42.24,-14.91 ; J8.8@41.716,6.35 41.716,5.301 v1(41.72,5.296) ; U1.P12@42.24,-19.71 v1(42.64,-20.11) ; U1.M12@42.24,-18.11 v1(42.64,-18.51) ; U1.L12@42.24,-17.31 v1(42.64,-17.71) ; U1.F12@42.24,-13.31 v1(42.64,-12.91) ; U1.E12@42.24,-12.51 v1(42.64,-12.11) ; v1(43.549,3.645) 43.554,3.65 J8.5@44.166,3.65 ; U1.R14@43.84,-20.51 v1(44.24,-20.91) ; U1.P14@43.84,-19.71 v1(44.24,-20.11) ; U1.M14@43.84,-18.11 v1(44.24,-18.51) ; U1.K14@43.84,-16.51 v1(44.241,-16.111) ; U1.H14@43.84,-14.91 v1(44.241,-14.51) ; U1.F14@43.84,-13.31 v1(44.24,-12.91) ; U1.E14@43.84,-12.51 v1(44.24,-12.11) ; R9.1@44.108,-27.217 44.12,-27.217 v1(44.12,-28.092) ; v1(44.26,4.89) 44.266,4.896 J8.11@44.266,6.35 ; U1.R15@44.64,-20.51 v1(45.04,-20.91) ; U1.P15@44.64,-19.71 v1(45.04,-20.11) ; U1.M15@44.64,-18.11 v1(45.04,-18.51) ; U1.K15@44.64,-16.51 v1(45.04,-16.11) ; U1.H15@44.64,-14.91 v1(45.04,-14.51) ; U1.F15@44.64,-13.31 v1(45.04,-12.91) ; U1.E15@44.64,-12.51 v1(45.04,-12.11) ; U1.G16@45.44,-14.11 v1(45.84,-13.71) ; U1.G17@46.24,-14.11 v1(46.64,-13.71) ; J8.10@46.666,6.35 46.666,4.999 v1(46.673,4.992) ; U1.L18@47.04,-17.31 v1(47.44,-17.71) ; U1.W19@47.84,-23.71 v1(48.24,-24.11) ; U1.A19@47.84,-9.31 v1(48.24,-8.91) ; J8.7@48.766,3.75 49.922,3.75 v1(49.925,3.747) ; v1(49.213,5.22) 49.216,5.223 J8.9@49.216,6.35 ; v1(49.542,-4.108) C95.1@50.331,-4.108 ; U16.2@52.101,3.452 52.467,3.452 v1(52.998,2.921) 52.999,2.92 R86.2@54.014,2.92 ; v1(52.871,-1.882) 52.871,-2.578 53.506,-2.578 C93.2@53.506,-3.087 ; C94.2@56.3,-3.087 56.542,-3.087 v1(56.542,-1.882) ; U15.2@58.23,3.771 v1(59.234,3.772) v1(59.234,3.772) ; v1(60.042,-17.309) 60.071,-17.28 C4.1@60.071,-16.688 ; v1(62.523,0.242) 62.549,0.242 62.574,0.267 U2.2@62.574,-0.688 ; v1(78.404,-38.623) 78.803,-39.023 J1.135@78.803,-41.024 ; v1(78.576,-27.825) 78.588,-27.813 C67.1@79.248,-27.813 ; v1(78.677,-24.803) 78.703,-24.777 C68.1@79.414,-24.777 ; U5.11@79.731,-8.179 79.731,-6.616 v1(79.744,-6.616) ; C70.1@80.773,-31.991 80.773,-30.683 v1(80.786,-30.67) ; U14.8@82.218,-24.257 U14.19@83.693,-24.257 ; C48.1@82.646,-14.898 v1(83.796,-14.897) v1(83.796,-14.897) ; U5.6@84.201,2.616 84.24,2.743 v1(84.24,1.461) ; LD1.1@84.246,-17.298 85.372,-17.298 v1(85.447,-17.373) ; R70.2@85.217,-19.05 v1(86.004,-19.05) ; v1(85.459,-6.616) 85.446,-6.616 85.446,-7.886 85.508,-7.886 U5.12@85.522,-7.899 ; v1(86.36,-29.337) 86.374,-29.337 R73.2@86.374,-29.959 ; v1(87.205,-39.223) 87.316,-39.223 87.603,-39.511 J1.157@87.603,-41.024 ; v1(87.263,-19.354) 87.288,-19.38 C66.1@87.288,-20.423 ; R71.2@87.288,-28.321 89.03,-28.321 v1(89.03,-28.334) ; v1(89.244,-20.675) 89.32,-20.751 C65.1@89.32,-21.502 ; v1(95.864,-38.788) 96.398,-39.322 96.403,-39.322 J1.179@96.403,-41.024
  Primary Side w0.305: J1.19@8.935,-41.024 8.935,-38.939 v1(8.939,-38.934) ; v1(15.24,-39.243) 15.335,-39.338 J1.35@15.335,-41.024 ; v1(19.914,-39.141) 20.135,-39.363 J1.47@20.135,-41.024 ; v1(27.92,2.352) 27.92,1.88 28.142,1.658 29.14,1.658 A:C24.1@29.693,2.21 ; v1(30.529,-39.163) 30.535,-39.168 J1.65@30.535,-41.024 ; U1.L5@36.64,-17.31 v1(37.04,-17.71) ; v1(37.516,-39.243) 37.735,-39.462 J1.83@37.735,-41.024 ; J1.97@43.335,-41.024 43.335,-39.522 v1(43.637,-39.218) ; J1.111@48.935,-41.024 48.935,-39.218 49.189,-38.964 v1(49.759,-38.964) ; v1(61.075,-11.812) 61.087,-11.824 U4.2@61.087,-12.802 ; v1@74.028,4.688 U5.10@74.028,6.261 ; v1(79.744,-6.616) 79.744,-7.837 U5.11@79.807,-7.899 ; v1(85.967,5.322) 86.018,5.271 U5.9@87.185,5.271
  Primary Side w0.508: C74.1@58.115,-10.147 58.61,-9.652 60.046,-9.652 C2.1@60.071,-9.677 60.071,-10.389 61.075,-11.392 v1(61.075,-11.812) ; v1(60.943,-4.408) 61.087,-4.552 U3.2@61.087,-5.436
  Secondary Side w0.135: C47.1@23.952,-27.584 24.433,-27.584 24.539,-27.479 v1@24.539,-27.203 ; v1(24.535,-27.199) v1@24.539,-27.203 ; C46.1@25.222,-27.203 v1@24.539,-27.203 ; J9.1@27.92,1.352 v1(27.92,2.352) ; v1(29.515,4.902) 29.52,4.851 J9.10@29.52,3.992 ; v1(29.591,-32.258) C45.1@29.591,-31.496 ; J9.19@31.52,1.352 v1(31.52,2.239) ; J9.29@33.52,1.352 v1(33.521,2.252) ; J9.51@37.92,1.352 37.92,0.406 v1(37.935,0.406) ; v1(38.64,-20.91) 38.646,-20.904 C44.1@38.735,-20.904 ; v1(38.64,-20.11) 38.64,-19.71 C13.1@38.735,-19.71 ; v1(38.64,-17.71) 38.722,-17.71 C51.2@38.722,-17.945 ; v1(38.64,-16.91) 38.64,-16.77 C50.2@38.722,-16.688 ; C78.1@40.181,-22.602 40.232,-22.602 v1(40.232,-23.313) ; C90.1@40.772,-18.224 v1(41.04,-18.51) ; v1(41.045,-23.313) 41.045,-22.602 C79.1@41.172,-22.602 ; v1(41.84,-18.51) 41.84,-18.309 C54.2@41.949,-18.2 ; D4.4@46.499,0.616 46.813,0.616 46.94,0.489 46.94,0.266 47.08,0.126 v1(47.08,-0.141)
  Secondary Side w0.203: J9.42@35.92,3.992 v1(35.92,4.992)
  Secondary Side w0.254: C18.1@2.579,-29.287 3.43,-30.138 v1(3.468,-30.138) 4.319,-29.287 C19.1@4.357,-29.287 ; J1.10@4.935,-41.024 4.935,-39.155 v1(4.992,-39.155) ; C10.1@5.246,-25.947 5.246,-23.761 v1(5.258,-23.749) ; C22.1@6.135,-29.287 6.175,-29.287 v1(7.126,-30.238) 8.04,-29.324 C23.1@8.04,-29.287 ; C26.1@9.691,-29.287 9.705,-29.287 v1(10.656,-30.238) 11.596,-29.298 C27.1@11.596,-29.287 ; C11.1@12.485,-25.947 12.485,-23.761 v1(12.497,-23.749) ; C30.1@13.247,-29.287 14.022,-30.062 v1(14.111,-30.162) 14.196,-30.076 14.363,-30.076 C31.1@15.152,-29.287 ; C34.1@16.803,-29.287 16.803,-29.375 v1(17.59,-30.162) 17.676,-30.076 17.919,-30.076 C35.1@18.708,-29.287 ; C12.1@19.597,-26.074 19.597,-23.761 v1(19.609,-23.749) ; C38.1@20.486,-29.287 20.64,-29.287 v1@21.489,-30.137 ; v1(21.464,-30.162) v1@21.489,-30.137 ; A:U8.4@21.712,-10.315 21.763,-10.302 v1(23.014,-10.302) ; C39.1@22.391,-29.287 22.339,-29.287 v1@21.489,-30.137 ; v1(23.319,1.623) 23.363,1.667 A:C21.1@23.363,3.02 ; A:C23.1@23.363,-3.076 23.363,-4.464 v1(23.369,-4.47) ; C43.2@24.232,-31.686 25.184,-31.686 v1(25.197,-31.699) 25.527,-31.699 25.73,-31.496 C42.2@25.73,-30.912 ; v1(24.639,-5.689) 24.639,-6.459 A:C26.1@24.644,-6.465 ; v1(31.065,-11.24) 31.535,-11.24 31.789,-11.494 C81.1@31.789,-12.485 ; C72.1@31.535,-16.587 31.535,-16.904 v1(32.462,-16.904) 32.462,-16.802 33.223,-16.041 C89.1@34.583,-16.041 ; C53.2@32.258,-8.763 33.04,-8.763 v1(33.04,-8.91) ; v1(35.14,-5.709) 35.14,-5.702 36.234,-5.702 C71.1@36.234,-6.199 ; C63.2@37.885,-14.644 C62.2@38.901,-14.644 38.7,-14.443 38.7,-14.45 v1(38.64,-14.51) ; C64.2@38.006,-15.671 38.012,-15.332 38.034,-15.31 v1(38.64,-15.31) ; v1(39.44,-17.71) 39.44,-18.2 C52.2@39.748,-18.224 ; v1(39.446,-24.486) 39.446,-25.146 C49.2@39.497,-25.146 ; v1(40.24,-14.51) 40.257,-14.493 40.933,-14.493 C60.2@40.933,-14.644 ; v1(40.24,-8.91) 40.298,-8.968 C88.1@40.298,-10.199 ; v1(40.781,-3.29) 40.781,-4.395 C73.1@40.806,-4.395 ; C54.2@41.949,-18.2 41.875,-18.126 v1@41.875,-17.732 ; C56.2@42.076,-17.057 41.875,-17.057 v1@41.875,-17.676 ; C59.2@42.076,-13.628 42.372,-13.332 42.372,-13.147 42.609,-12.91 v1(42.64,-12.91) ; v1(42.202,2.819) R79.2@42.85,2.819 ; C87.1@42.584,-10.351 42.584,-9.71 v1(42.64,-9.71) ; C85.1@45.784,-16.879 46.609,-16.879 v1(47.44,-17.71) ; v1(46.64,-13.71) 47.484,-12.866 C86.1@47.537,-12.866 ; v1(48.24,-24.11) 48.748,-24.11 C57.2@48.895,-24.257 ; v1(48.24,-8.91) 48.514,-8.91 C58.2@48.514,-8.89 ; C75.1@50.204,-22.429 51.235,-22.429 v1(51.236,-22.431) ; R11.1@50.839,-14.771 v1(50.839,-13.982) ; C76.1@51.855,-10.961 C77.1@51.855,-9.818 v1(52.528,-9.817) v1(52.528,-9.817) ; C92.1@52.706,-8.421 v1(53.76,-8.42) v1(53.76,-8.42) ; v1(56.833,-7.456) 56.833,-6.135 C91.1@57.126,-6.135 ; v1(62.523,0.242) C1.1@62.523,1.104 ; R22.2@74.676,-23.495 v1(74.676,-22.733) ; R23.2@75.946,-23.495 v1(75.946,-22.733) ; C6.1@83.097,0.723 83.835,0.723 v1(83.859,0.699) ; v1(86.272,-2.07) R17.2@86.272,-1.055 ; v1@41.875,-17.732 v1@41.875,-17.676 ; v1@41.875,-17.732 v1(41.84,-17.71) v1@41.875,-17.676
  Secondary Side w0.305: v1(9.727,-38.934) 9.735,-38.942 J1.22@9.735,-41.024 ; v1(16.129,-39.167) 16.137,-39.175 J1.38@16.137,-41.024 ; v1(18.974,-38.938) 19.329,-39.294 19.337,-39.294 J1.46@19.337,-41.024 ; C9.1@23.341,-21.586 25.078,-21.586 C16.1@25.209,-21.717 ; v1(24.93,-20.27) 24.93,-21.717 C16.1@25.209,-21.717 ; C14.1@25.159,-24.282 25.159,-21.768 C16.1@25.209,-21.717 ; v1(28.525,-20.003) 28.551,-19.977 C83.1@29.464,-19.977 ; v1(31.572,-33.858) 31.585,-33.846 C17.1@33.02,-33.846 ; C80.1@35.878,-8.128 35.878,-6.199 C71.1@36.234,-6.199 ; v1(39.44,-14.51) 39.783,-14.51 C61.2@39.917,-14.644 ; v1(42.64,-17.71) 43.092,-18.162 C55.2@43.092,-18.2 ; v1(44.806,-27.711) 44.806,-27.318 45.073,-27.051 C84.1@45.073,-26.174 ; v1(60.943,-4.408) 60.96,-4.425 C3.1@60.96,-5.334 ; v1(61.075,-11.812) 61.075,-12.942 C5.1@61.087,-12.954
  Secondary Side w0.508: v1(21.082,0.737) A:C31.1@21.082,4.14 v1(21.082,6.426) ; v1(36.408,-34.937) 36.408,-33.846 C15.1@36.83,-33.846
  other v1: 74.029,4.687
HSEC_5V0: D1.2 J1.48 J1.84 J1.98 J1.112 J1.158 J1.180 | length 19.3
  Primary Side w0.135: D1.2@91.352,-27.979 91.352,-27.94 v2(92.583,-27.94) v2(92.583,-28.702) v2(92.583,-29.464)
  Secondary Side w0.254: J1.48@20.135,-41.024 20.135,-39.853 20.574,-39.414 v1(20.574,-37.998) ; J1.84@37.736,-41.024 37.736,-39.734 38.1,-39.37 v1(38.1,-38.735) ; v1(43.053,-38.735) 43.083,-38.765 43.083,-39.578 43.337,-39.832 J1.98@43.337,-41.024 ; J1.112@48.937,-41.024 48.937,-39.243 49.149,-39.031 v1(49.149,-38.354) ; J1.158@87.605,-41.024 87.605,-39.497 87.859,-39.243 87.859,-38.887 v1(87.884,-38.862) ; v1(95.885,-37.846) 96.393,-38.354 96.406,-38.354 J1.180@96.406,-41.024
HSEC_ADC-A0: J1.9 R27.1 | length 6.2
  Primary Side w0.114: R27.1@3.81,-36.157 3.81,-36.487 3.821,-36.498 4.138,-36.498 4.458,-36.817 4.458,-38.138 4.788,-38.468 5.139,-38.468 5.44,-38.769 5.44,-39.322 4.909,-39.853 4.858,-39.853 4.935,-39.93 J1.9@4.935,-41.024
HSEC_ADC-A1: J1.11 R28.1 | length 6.4
  Primary Side w0.114: R28.1@5.461,-36.157 5.735,-36.411 5.735,-36.652 4.953,-36.652 4.788,-36.817 4.788,-37.973 4.953,-38.138 5.24,-38.138 5.735,-38.633 J1.11@5.735,-41.024
HSEC_ADC-A2: J1.15 R29.1 | length 5.5
  Primary Side w0.114: R29.1@7.112,-36.157 7.112,-36.652 7.531,-36.652 7.696,-36.817 7.696,-37.211 7.595,-37.313 7.595,-39.23 7.366,-39.459 7.366,-40.993 J1.15@7.335,-41.024
HSEC_ADC-A3: J1.17 R30.1 | length 5.5
  Primary Side w0.114: J1.17@8.135,-41.024 8.128,-41.017 8.128,-39.459 7.925,-39.256 7.925,-37.478 8.255,-37.148 8.255,-36.652 8.42,-36.487 8.763,-36.487 R30.1@8.763,-36.157
HSEC_ADC-A4: J1.21 R31.1 | length 5.6
  Primary Side w0.114: J1.21@9.735,-41.024 9.735,-39.892 10.199,-39.428 10.199,-39.027 10.986,-38.239 10.986,-36.729 R31.1@10.414,-36.157
HSEC_ADC-A5: J1.23 R32.1 | length 5.5
  Primary Side w0.114: J1.23@10.535,-41.024 10.535,-39.199 11.317,-38.417 11.317,-36.905 R32.1@12.065,-36.157
HSEC_ADC-B0: J1.12 R33.1 | length 6.5
  Secondary Side w0.114: R33.1@2.921,-36.157 2.921,-36.271 3.467,-36.817 3.467,-37.008 3.937,-37.478 4.458,-37.478 5.944,-38.964 5.944,-39.334 5.735,-39.542 J1.12@5.735,-41.024
HSEC_ADC-B1: J1.14 R34.1 | length 6.5
  Secondary Side w0.114: R34.1@4.572,-36.157 3.962,-36.767 3.962,-36.982 4.127,-37.148 4.623,-37.148 6.274,-38.798 6.274,-39.363 6.535,-39.624 J1.14@6.535,-41.024
HSEC_ADC-B2: J1.18 R35.1 | length 6.2
  Secondary Side w0.114: R35.1@6.223,-36.157 6.223,-36.322 6.769,-36.817 6.769,-37.808 7.099,-38.138 7.925,-38.138 8.09,-38.303 8.09,-40.945 J1.18@8.135,-41.024
HSEC_ADC-B3: J1.20 R36.1 | length 6.4
  Secondary Side w0.114: R36.1@7.874,-36.157 7.099,-36.932 7.099,-37.643 7.264,-37.808 8.09,-37.808 8.42,-38.138 8.42,-39.409 8.89,-39.879 8.89,-40.979 J1.20@8.935,-41.024
HSEC_ADC-B4: J1.24 R37.1 | length 5.5
  Secondary Side w0.114: R37.1@9.525,-36.157 9.525,-36.322 10.071,-36.817 10.071,-37.343 10.371,-37.643 10.536,-37.643 10.701,-37.808 10.701,-39.294 10.536,-39.459 J1.24@10.536,-41.024
HSEC_ADC-B5: J1.26 R38.1 | length 5.8
  Secondary Side w0.114: R38.1@11.176,-36.157 11.208,-36.189 10.738,-36.659 10.56,-36.659 10.401,-36.817 10.401,-37.148 10.566,-37.313 10.731,-37.313 11.062,-37.643 11.062,-39.02 11.335,-39.294 J1.26@11.335,-41.024
HSEC_ADC-C2: J1.31 R41.1 | length 7.8
  Primary Side w0.114: 13.977,-38.893 14.897,-37.973 16.675,-37.973 17.616,-37.032 17.616,-36.755 R41.1@17.018,-36.157
  Primary Side w0.135: J1.31@13.735,-41.024 13.735,-39.941 13.977,-39.699 13.977,-38.893
HSEC_ADC-C3: J1.33 R42.1 | length 7.8
  Primary Side w0.114: J1.33@14.535,-41.024 14.535,-39.89 14.339,-39.694 14.339,-38.988 15.024,-38.303 16.84,-38.303 18.009,-37.134 18.009,-36.817 R42.1@18.669,-36.157
HSEC_ADC-C4: J1.37 R43.1 | length 8.4
  Primary Side w0.114: J1.37@16.135,-41.024 16.129,-41.024 16.129,-39.866 16.573,-39.422 16.573,-39.053 18.479,-37.148 20.74,-37.148 20.867,-37.02 20.867,-36.704 R43.1@20.32,-36.157
HSEC_ADC-C5: J1.39 R44.1 | length 8.3
  Primary Side w0.114: J1.39@16.935,-41.024 16.935,-39.199 18.657,-37.478 20.943,-37.478 21.299,-37.122 21.299,-36.829 R44.1@21.971,-36.157
HSEC_ADC-D0: J1.28 R45.1 | length 5.7
  Secondary Side w0.114: J1.28@12.135,-41.024 12.135,-39.459 12.386,-39.208 12.386,-38.63 13.538,-37.478 13.538,-36.982 R45.1@12.878,-36.322
  Secondary Side w0.135: R45.1@12.827,-36.157 R45.1@12.878,-36.322
HSEC_ADC-D1: J1.30 R46.1 | length 5.9
  Secondary Side w0.114: J1.30@12.935,-41.024 12.935,-39.459 12.713,-39.237 12.713,-38.798 13.868,-37.643 13.868,-36.817 14.16,-36.526 14.459,-36.526 14.459,-36.157 R46.1@14.478,-36.157
HSEC_ADC-D2: J1.34 R47.1 | length 6.4
  Secondary Side w0.114: J1.34@14.537,-41.024 14.537,-39.294 15.276,-38.555 15.598,-38.555 16.675,-37.478 16.675,-36.817 16.51,-36.652 16.129,-36.652 R47.1@16.129,-36.157
HSEC_ADC-D3: J1.36 R48.1 | length 6.2
  Secondary Side w0.114: J1.36@15.337,-41.024 15.367,-41.024 15.367,-39.917 15.711,-39.573 15.711,-38.937 16.99,-37.659 16.99,-36.982 17.32,-36.652 17.78,-36.652 R48.1@17.78,-36.157
HSEC_ADC-D4: J1.40 R49.1 | length 6.1
  Secondary Side w0.114: J1.40@16.937,-41.024 16.937,-39.362 17.196,-39.103 17.475,-39.103 19.431,-37.148 R49.1@19.431,-36.157
HSEC_ADC-D5: J1.42 R50.1 | length 6.4
  Secondary Side w0.114: J1.42@17.737,-41.024 17.737,-39.3 19.823,-37.214 19.977,-37.214 21.034,-36.157 R50.1@21.082,-36.157
HSEC_ADC-VREFHI: J1.45 R59.2 | length 14.2
  Primary Side w0.135: J1.45@19.335,-41.024 19.335,-39.357 19.444,-39.249 19.444,-38.748 v1(19.71,-38.481)
  Inner Layer 7 w0.14: v1(19.71,-38.481) 20.168,-38.481 20.244,-38.557 20.803,-38.557 20.98,-38.379 20.98,-37.744 23.47,-35.255 24.079,-35.255 25.298,-34.036 v1(25.298,-32.817)
  Secondary Side w0.135: v1(25.298,-32.817) 25.336,-32.779 R59.2@27.686,-32.779
HSEC_ADCIN14: J1.25 R39.1 | length 6.9
  Primary Side w0.114: J1.25@11.335,-41.024 11.335,-39.839 11.532,-39.642 11.532,-39.141 13.195,-37.478 14.033,-37.478 14.364,-37.147 14.364,-36.805 R39.1@13.716,-36.157
HSEC_ADCIN15: J1.27 R40.1 | length 6.9
  Primary Side w0.114: J1.27@12.135,-41.024 12.135,-39.865 11.901,-39.631 11.901,-39.306 13.399,-37.808 14.16,-37.808 14.694,-37.274 14.694,-36.817 15.354,-36.157 R40.1@15.367,-36.157
HSEC_GPIO-42: J1.93 J2.3 | length 27.3
  Primary Side w0.127: J1.93@41.735,-41.024 41.746,-41.013 41.746,-39.023 41.737,-39.023 v1(41.337,-38.623) 41.737,-38.223 41.737,-37.44 41.893,-37.283 41.893,-35.78 48.476,-29.197 57.137,-29.197 58.115,-28.219 58.115,-27.571 J2.3@56.935,-26.391
HSEC_GPIO-43: J1.95 J3.3 | length 27.3
  Primary Side w0.127: J1.95@42.535,-41.024 42.535,-38.221 v1(42.137,-37.823) 42.533,-37.427 42.533,-37.173 42.189,-36.83 42.189,-35.903 48.616,-29.477 57.277,-29.477 58.395,-28.359 58.395,-27.471 J3.3@59.475,-26.391
HSEC_GPIO-46: J1.94 J4.3 | length 33.8
  Secondary Side w0.114: J1.94@41.737,-41.024 41.737,-39.023 ; 41.737,-39.023 v1(42.137,-38.623) 41.737,-38.223 41.737,-37.504 42.1,-37.14 42.1,-35.827 43.917,-34.011 53.657,-34.011 54.648,-33.02 54.648,-30.048 55.804,-28.892 62.408,-28.892 63.068,-28.232 63.068,-27.381 62.269,-26.582 62.206,-26.582 J4.3@62.015,-26.391
HSEC_GPIO-47: J1.96 J5.3 | length 33.7
  Secondary Side w0.114: J1.96@42.537,-41.024 42.537,-38.223 ; 42.537,-38.223 v1(42.937,-37.823) 42.431,-37.317 42.431,-35.992 44.082,-34.341 53.823,-34.341 54.978,-33.185 54.978,-30.213 55.969,-29.223 62.573,-29.223 63.398,-28.397 63.398,-27.548 J5.3@64.555,-26.391
HSEC_GPIO-120: J1.165 J7.3 | length 33.5
  Primary Side w0.114: J1.165@90.803,-41.024 90.803,-38.223 v1(91.204,-37.823)
  Secondary Side w0.114: J7.3@69.635,-26.391 68.516,-27.51 68.516,-28.562 68.847,-28.892 73.635,-28.892 79.908,-35.166 90.145,-35.166 90.97,-35.992 90.97,-37.27 91.204,-37.504 v1(91.204,-37.823)
HSEC_GPIO-121: J1.166 J6.3 | length 33.5
  Secondary Side w0.114: J6.3@67.095,-26.391 68.186,-27.482 68.186,-28.727 68.682,-29.223 73.469,-29.223 79.743,-35.496 89.98,-35.496 90.64,-36.157 90.64,-37.267 90.404,-37.504 v1(90.404,-37.823) 90.805,-38.223 J1.166@90.805,-41.024
IN_5V0: C65.2 C66.2 D1.1 R62.2 R64.2 R65.1 R69.2 TP4.1 U14.3 | length 24.5
  Primary Side w0.254: R65.1@79.248,-26.543 79.248,-25.996 79.604,-25.641 v1(80.862,-25.641) R64.2@80.862,-24.777 ; U14.3@85.168,-24.257 85.929,-24.257 86.094,-24.091 v1(86.602,-24.091) R69.2@87.288,-24.091 ; C66.2@87.288,-22.518 C66.2@87.288,-22.328 ; D1.1@91.352,-25.376 93.956,-25.376 TP4.1@94.019,-25.439
  Primary Side w0.508: R69.2@87.288,-24.091 87.288,-22.518 C65.2@89.32,-22.518 R62.2@91.352,-22.518
  Primary Side w0.762: D1.1@91.352,-25.376 R62.2@91.352,-22.518
  Secondary Side w0.254: v1(80.862,-25.641) 81.878,-25.641 82.564,-26.327 85.802,-26.327 86.602,-25.527 v1(86.602,-24.091)
MCU_ADC-A0: C18.2 R27.2 U1.U1 U6.1 | length 46.6
  Primary Side w0.114: U6.1@2.479,-31.013 2.54,-31.074 v1(2.54,-32.043) ; R27.2@3.81,-34.455 R27.2@3.81,-34.328
  Primary Side w0.135: v1(2.54,-32.043) 3.266,-32.043 3.341,-32.118 3.341,-32.372 4.382,-33.413 4.382,-33.755 R27.2@3.81,-34.328 ; v1(33.04,-22.51) U1.U1@33.44,-22.11
  Inner Layer 3 w0.109: v1(2.54,-32.043) 3.175,-32.043 3.353,-32.221 3.353,-32.69 4.039,-33.376 4.877,-33.376 5.475,-32.778 5.475,-29.605 6.961,-28.118 22.804,-28.118 24.282,-26.639 24.282,-22.987 25.019,-22.25 32.78,-22.25 v1(33.04,-22.51)
  Secondary Side w0.135: v1(2.54,-32.043) 2.54,-31.077 C18.2@2.579,-30.989